# EAGLE board ClassD-V2 (EAGLE 7.6.0)
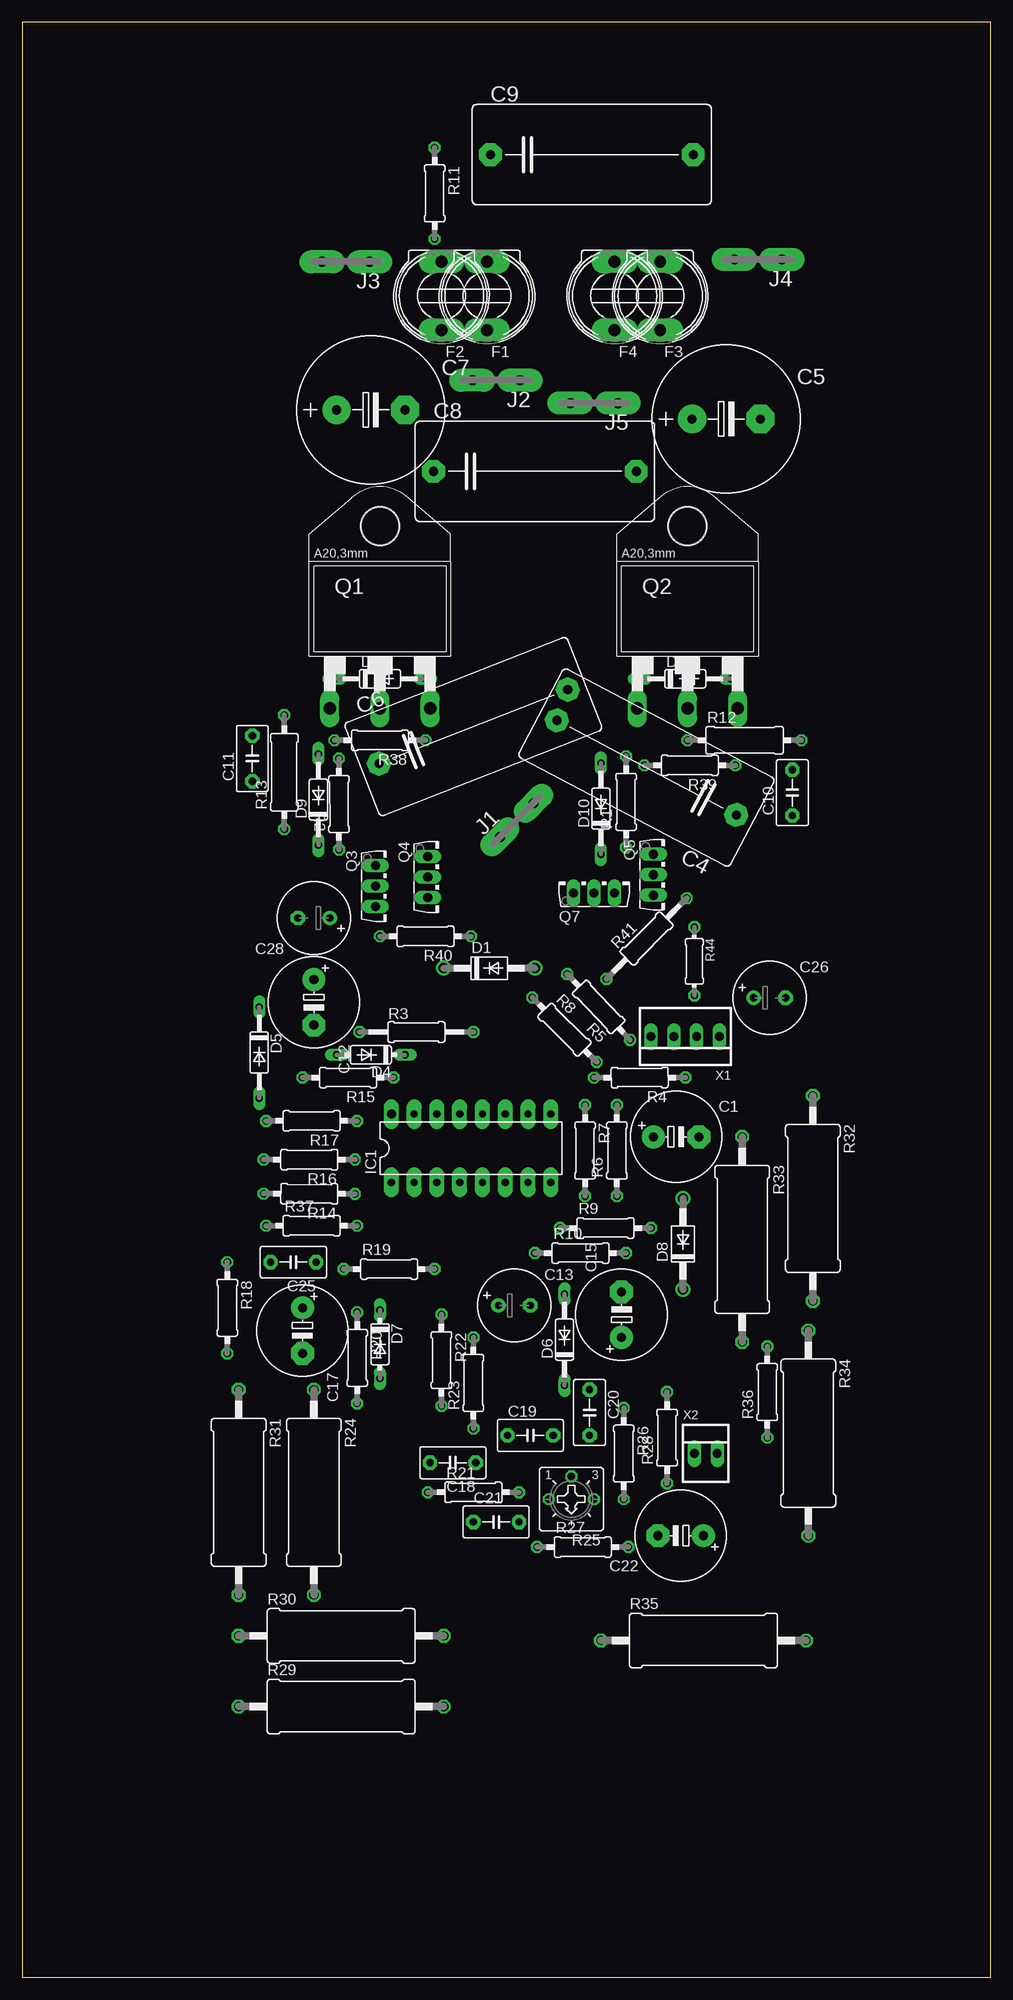
[diagram p0: board, top side]
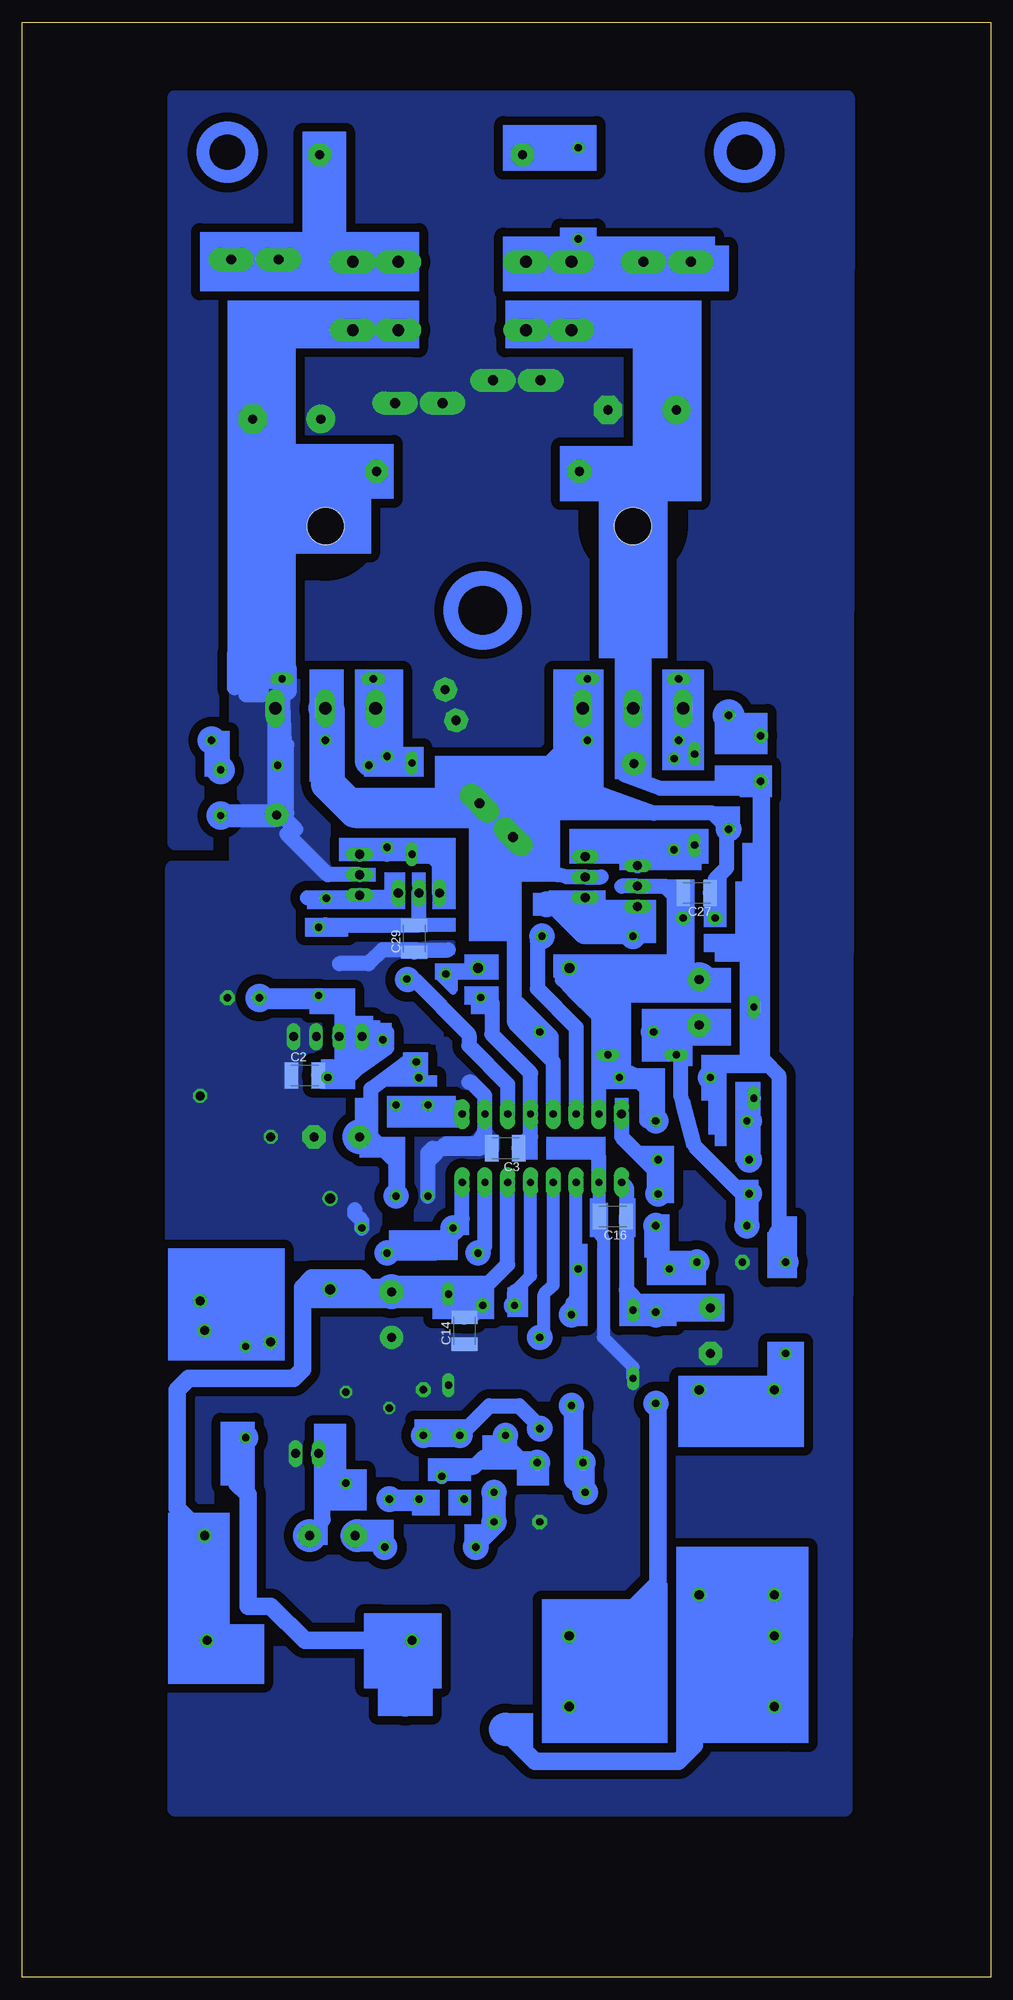
[diagram p1: board, bottom side, seen from below]

Size 107.93 x 217.86 mm. Coordinates in mm from the lower left corner, seen from the top.
Outline: 107.93,217.86 0,217.86 0,0 107.93,0 107.93,217.86
Copper layers (1*16): Top 0.035mm / dielectric 1.5mm / Bottom 0.035mm
Design rules "default": minimum track width 10mil, minimum drill 24mil, track to track 8mil, track to pad 8mil, pad to pad 8mil, via to via 8mil, smd to smd 8mil, copper to edge 40mil, drill to drill 8mil, minimum pad ring 10mil, minimum via ring 8mil, stop-mask expansion 4mil, vias tented up to drill 0mil, thermal gap 10mil

## Footprints (pad centres in the part's own frame; a part is rotated, then mirrored left to right if it is on the bottom)
E5-10,5 = drill 1.016 pad 2.54: + -2.54,0 | drill 1.016 pad 2.54 octagon: - 2.54,0
C1210K = smd 1.5 x 2.9: 1 -1.5,0; 2 1.5,0
C22.5B11 = drill 1.016 pad 2.54 octagon: 1 -11.303,0; 2 11.303,0
E7,5-16 = drill 1.016 pad 3.15: + -3.81,0 | drill 1.016 pad 3.15 octagon: - 3.81,0
C5B3.5 = drill 0.813 pad 1.6 octagon: 1 -2.54,0; 2 2.54,0
E3,5-8 = drill 0.813 pad 1.6: + -1.778,0 | drill 0.813 pad 1.6 octagon: - 1.778,0
DO41-10 = drill 1.118: A 5.08,0; C -5.08,0
DO35-10 = drill 0.813 long: A 5.08,0; C -5.08,0
DO35-7 = drill 0.813 long: A 3.81,0; C -3.81,0
KS9V = drill 1.321 pad 2.54 long: 1 0,3.81; 2 0,-3.81
DIL16 = drill 0.813 pad 1.676 long: 1 -8.89,-3.81; 2 -6.35,-3.81; 3 -3.81,-3.81; 4 -1.27,-3.81; 5 1.27,-3.81; 6 3.81,-3.81; 7 6.35,-3.81; 8 8.89,-3.81; 9 8.89,3.81; 10 6.35,3.81; 11 3.81,3.81; 12 1.27,3.81; 13 -1.27,3.81; 14 -3.81,3.81; 15 -6.35,3.81 | drill 1 pad 1.676 long: 16 -8.89,3.81
F061.040 = drill 1.1 pad 2.54 long: A1 -2.65,0; A2 2.65,0
TOP3 = drill 1.397 long: 1 -5.588,-7.62; 2 0,-7.62; 3 5.588,-7.62 | hole 4.115: 0,12.7
TO126AV = drill 1.016 long: B 2.286,-1.27; C 0,-1.27; E -2.286,-1.27
0207/10 = drill 0.813 octagon: 1 -5.08,0; 2 5.08,0
0207/12 = drill 0.813 octagon: 1 -6.35,0; 2 6.35,0
0309/12 = drill 0.813 octagon: 1 -6.35,0; 2 6.35,0
0617/22 = drill 1.016 octagon: 1 -11.43,0; 2 11.43,0
CT6 = drill 0.813 octagon: A 2.515,0; E -2.515,0; S 0,-2.54
0204/7 = drill 0.813 octagon: 1 -3.81,0; 2 3.81,0
22-23-2041 = drill 1 long: 1 -3.81,0; 2 -1.27,0; 3 1.27,0; 4 3.81,0
22-23-2021 = drill 1 long: 1 -1.27,0; 2 1.27,0

## Placement (x,y rotation side)
C1  22uF  [E5-10,5]  72.88,93.65 0 top
C2  .1  [C1210K]  76.43,100.51 0 bottom
C3  .1  [C1210K]  54.08,92.38 180 bottom
C4  220nF  [C22.5B11]  69.58,134.8 152.2 top
C5  470uF  [E7,5-16]  78.47,173.66 0 top
C6  220nF  [C22.5B11]  50.27,139.37 21.4 top
C7  470uF  [E7,5-16]  38.84,174.68 0 top
C8  220nF  [C22.5B11]  57.13,167.82 0 top
C9  220nF  [C22.5B11]  63.48,203.12 0 top
C10  1nF  [C5B3.5]  85.83,132 90 top
C11  1nF  [C5B3.5]  25.63,135.81 90 top
C12  22uF  [E5-10,5]  32.49,108.64 270 top
C13  10uF  [E3,5-8]  54.84,74.85 0 top
C14  .1  [C1210K]  58.65,72.06 90 bottom
C15  22uF  [E5-10,5]  66.78,73.84 90 top
C16  .1  [C1210K]  42.14,84.76 180 bottom
C17  22uF  [E5-10,5]  31.22,72.06 270 top
C18  2n2  [C5B3.5]  47.99,57.33 180 top
C19  2n2  [C5B3.5]  56.62,60.38 0 top
C20  1nF  [C5B3.5]  63.23,62.92 270 top
C21  HF_FLT  [C5B3.5]  52.81,50.72 0 top
C22  22uF  [E5-10,5]  73.39,49.2 180 top
C25  150pF  [C5B3.5]  30.21,79.68 180 top
C26  10uF  [E3,5-8]  83.29,109.14 0 top
C27  .1  [C1210K]  32.75,120.83 180 bottom
C28  10uF  [E3,5-8]  32.49,118.03 180 top
C29  .1  [C1210K]  64.24,115.75 90 bottom
D1  MUR1100  [DO41-10]  52.05,112.45 0 top
D2  18V  [DO35-10]  39.86,144.7 0 top
D3  18V  [DO35-10]  73.89,144.7 0 top
D4  15V  [DO35-7]  38.84,102.79 180 top
D5  MUR  [DO35-10]  26.4,103.05 270 top
D6  5V6  [DO35-10]  60.43,71.04 90 top
D7  5V6  [DO35-7]  39.86,70.54 270 top
D8  MUR1100  [DO41-10]  73.64,81.71 90 top
D9  4148  [DO35-10]  33,131.24 90 top
D10  4148  [DO35-10]  64.5,130.23 90 top
F1  7A  [KS9V]  51.8,187.38 180 top
F2  [KS9V]  46.72,187.38 180 top
F3  [KS9V]  71.1,187.38 180 top
F4  7A  [KS9V]  66.02,187.38 180 top
IC1  IRS2092  [DIL16]  50.02,92.38 0 top
J1  PWM  [F061.040]  55.1,128.96 45 top
J2  GND  [F061.040]  52.81,177.98 180 top
J3  VCC  [F061.040]  36.05,191.19 180 top
J4  VEE  [F061.040]  82.02,191.44 180 top
J5  PWMGND  [F061.040]  63.73,175.44 180 top
Q1  FQA27N25  [TOP3]  39.86,149.02 0 top
Q2  FQA27N25  [TOP3]  74.15,149.02 0 top
Q3  C2690A  [TO126AV]  40.62,121.59 270 top
Q4  A1220A  [TO126AV]  46.46,122.61 270 top
Q5  A1220A  [TO126AV]  71.61,122.86 270 top
Q7  C2690A  [TO126AV]  63.73,122.1 0 top
R1  10  [0207/10]  67.29,130.99 90 top
R2  10  [0207/10]  35.29,130.73 90.1 top
R3  0R  [0207/12]  43.92,105.33 0 top
R4  10  [0207/10]  68.81,100.25 180.1 top
R5  4R7  [0207/10]  64.24,108.13 133.7 top
R6  NC  [0207/10]  66.27,92.13 90 top
R7  10K  [0207/10]  62.72,92.13 270 top
R8  0  [0207/10]  60.43,105.59 315 top
R9  7K5  [0207/10]  65,83.49 0 top
R10  10K  [0207/10]  62.21,80.7 0 top
R11  1  [0207/10]  45.95,198.81 270 top
R12  10  [0309/12]  80.5,137.85 0 top
R13  10  [0309/12]  29.19,134.29 90 top
R14  10K  [0207/10]  31.98,87.3 179.8 top
R15  33K  [0207/10]  36.3,100.25 180 top
R16  9K1  [0207/10]  31.98,91.11 180 top
R17  10K  [0207/10]  32.24,95.43 180 top
R18  0R  [0207/10]  22.84,74.6 270 top
R19  100K  [0207/10]  40.87,78.92 0 top
R20  0R  [0207/10]  37.32,69.01 270 top
R21  3K  [0207/10]  50.27,54.03 0 top
R22  0R  [0207/10]  46.72,68.76 270 top
R23  0R  [0207/10]  50.27,66.22 90 top
R24  4K7  [0617/22]  32.49,54.03 270 top
R25  2K  [CT6]  61.19,53.26 180 top
R26  100  [0207/10]  67.04,58.34 270 top
R27  470  [0207/10]  62.46,47.93 0 top
R28  69K  [0207/10]  71.86,60.12 90 top
R29  4K7  [0617/22]  35.54,30.15 0 top
R30  4K7  [0617/22]  35.54,38.02 0 top
R31  4K7  [0617/22]  24.11,54.03 270 top
R32  4K7  [0617/22]  88.12,86.79 270 top
R33  4K7  [0617/22]  80.24,82.22 270 top
R34  4K7  [0617/22]  87.61,60.63 270 top
R35  4K7  [0617/22]  75.93,37.52 0 top
R36  0  [0207/10]  83.04,65.2 90 top
R37  1K  [0207/10]  32.24,83.74 0 top
R38  10K  [0207/10]  39.86,137.85 180 top
R39  10K  [0207/10]  74.4,135.05 180 top
R40  10  [0207/10]  44.94,116 180 top
R41  10  [0207/12]  69.58,115.75 45.1 top
R44  0R  [0204/7]  74.91,113.21 270 top
X1  12V  [22-23-2041]  73.89,104.83 180 top
X2  IN  [22-23-2021]  76.18,58.34 0 top

## Library data of the parts
C1-C3 C5 C7 C12-C17 C22 C26-C29 R1-R24 R26-R41 R44 = resistor
C4 C6 C8-C11 C18-C21 C25 = capacitor-wima
D1-D10 = diode
F1-F4 = fuse; OC_FARNELL: unknown; OC_NEWARK: unknown
IC1 = ic-package
J1-J5 = con-faston; OC_FARNELL: unknown; OC_NEWARK: unknown
Q1 Q2 = transistor-fet
Q3-Q5 Q7 = transistor-power
R25 = pot
X1 = con-molex; MF: MOLEX; MPN: 22-23-2041; OC_FARNELL: 1462920; OC_NEWARK: 38C0355
X2 = con-molex; MF: MOLEX; MPN: 22-23-2021; OC_FARNELL: 1462926; OC_NEWARK: 25C3832

## Nets
COM: C1.- C2.1 C3.2 C4.1 C5.- C8.2 C10.1 C26.- C29.1 D3.A D8.A F3.1 F4.1 IC1.10 Q2.3 Q5.C R7.2 R9.2 R32.1 R33.1 R39.1 X1.1 X1.2
N$1: D2.C D9.A Q1.1 R2.2 R38.2
N$3: D3.C D10.A Q2.1 R1.2 R39.2
N$4: IC1.8 R9.1 R10.2
N$5: C6.1 C7.+ C8.1 C11.1 D5.C F1.1 F2.1 Q1.2 R15.2 R18.1
N$6: IC1.14 R40.1
N$7: IC1.11 R41.1
N$8: D1.A R5.2
N$9: C9.2 F3.2 F4.2 J4.A1 J4.A2
N$10: C3.1 IC1.12 R8.1
N$11: C12.+ C27.2 C28.+ D1.C D4.C IC1.15 Q3.C R15.1 R17.1
N$12: IC1.9 R6.2 R7.1
N$13: C1.+ R4.2 R6.1 R8.2
N$14: C9.1 R11.1
N$15: C11.2 R13.2
N$16: D9.C Q3.E Q4.E R2.1
N$17: R25.E R26.2
N$18: C2.2 C26.+ R4.1 R5.1 R44.2 X1.3 X1.4
N$19: IC1.7 R10.1
N$20: F1.2 F2.2 J3.A1 J3.A2 R11.2
N$21: C10.2 R12.2
N$22: IC1.16 R14.1 R16.1
N$23: D5.A R16.2 R17.2
N$24: C13.+ IC1.5
N$25: C25.1 R19.1 R37.2
N$26: IC1.3 R19.2 R22.1
N$27: C18.1 C19.1 R25.S
N$28: C19.2 C20.2 R23.1
N$29: C18.2 R21.1 R22.2
N$30: IC1.4 R23.2
N$31: R18.2 R24.1 R31.1
N$32: C21.2 R21.2 R27.1
N$33: C22.- R27.2
N$34: C22.+ R28.1 X2.1
N$35: R35.1 R36.1
N$36: R24.2 R29.1 R30.1 R31.2
N$37: R20.2 R29.2 R30.2
N$38: R32.2 R33.2 R34.1 R36.2
N$39: C13.- C14.2 C15.- D6.A D8.C IC1.6 R34.2 R35.2
N$40: C12.- D4.A R3.1 R14.2 R37.1
N$41: C27.1 C28.- D2.A IC1.13 J1.A1 J1.A2 Q1.3 Q2.2 Q4.C R3.2 R12.1 R13.1 R38.1
N$43: Q5.B Q7.B R41.2
N$44: Q3.B Q4.B R40.2
N$45: C29.2 Q7.C R44.1
N$47: D10.C Q5.E Q7.E R1.1
PGND: C4.2 C5.+ C6.2 C7.- C14.1 C15.+ C16.2 C17.- C20.1 C21.1 C25.2 D6.C D7.A IC1.2 J2.A1 J2.A2 J5.A1 J5.A2 R26.1 R28.2 X2.2
PGND1: C16.1 C17.+ D7.C IC1.1 R20.1

## Tracks (layer width: path | path; a pad name or v marks a point on that pad's centre or on a via)
COM
  Bottom 1.422: C5.- 79.99,183.57 F3.1 F4.1
  Bottom 1.676: 78.47,129.72 78.47,137.34 78.72,137.59 D3.A | IC1.10 56.37,94.16 57.13,92.89 60.69,92.89 62.72,90.86 R7.2 62.72,91.87 62.21,92.38 56.88,92.38 56.37,92.89 56.37,98.22 57.89,99.75 58.15,99.75 | R9.2 70.08,84.25 70.85,85.01 70.85,85.52 | D3.A 78.97,141.66 79.74,141.66 79.74,129.53 C4.1 79.04,129.53 77.45,127.94 78.47,127.43 73.89,122.86 Q5.C | C8.2 78.97,166.29 78.97,165.79 | 78.97,165.79 D3.A | 84.31,143.69 84.31,147.5 83.04,147.5 83.04,142.93 81.26,142.93 81.26,143.94 82.28,143.94 82.28,145.97 82.02,145.97 82.02,144.2 81.01,144.2 81.01,145.97 80.75,145.97 80.75,144.45 79.48,144.45 79.48,145.97 79.23,145.97 79.23,143.43 78.47,143.43 78.47,145.97 78.21,145.97 78.21,143.18 | C5.- 80.24,174.68 80.24,165.79 78.97,165.79 | C29.1 64.01,114.48 | 64.01,114.48 60.43,114.48 | 64.01,114.48 67.8,114.48 69.32,112.95 72.62,112.95
  Bottom 2.54: C10.1 79.57,129.46 C4.1
  pour Bottom (isolate 1.016, no thermals): 69.32,80.44 91.17,80.44 91.17,123.62 84.05,123.62 84.05,145.47 66.02,145.47 44.94,114.48 45.19,114.73 57.38,88.57 60.94,85.01 68.05,84.76
N$1
  Bottom 1.676: R38.2 34.78,135.34 R2.2 34.77,136.32 D9.A | R38.2 D2.C | R38.2 34.27,138.35 Q1.1
  Bottom 1.93: Q1.1 34.78,140.89 D2.C
N$2
  Bottom 1.676: 71.1,101.02 67.29,104.06 67.29,105.33 68.05,105.33 67.29,103.56 71.61,100.51
N$3
  Bottom 1.676: D10.A 65,135.81 67.29,135.81 | R39.2 68.31,136.07 R1.2 | 66.78,136.07 R1.2 | R1.2 67.29,135.81 | R1.2 67.54,135.81 67.29,135.81
  Bottom 1.93: R1.2 D3.C 68.56,138.1 Q2.1
N$4
  Bottom 1.676: R10.2 61.96,80.7 59.92,82.73 R9.1 58.91,84.51 IC1.8
N$5
  Bottom 1.422: C7.+ 35.54,183.57 F2.1 F1.1
  Bottom 1.676: C8.1 39.86,166.29 | 39.86,166.29 Q1.2 39.86,134.74 C6.1 40,136.07 39.1,136.07 40.87,134.04 36.81,132.51 27.16,132.51 | C7.+ 35.29,166.8 39.86,166.8 39.86,166.29 | 27.16,132.51 C11.1 | 27.16,102.03 26.9,102.29 D5.C 26.9,111.43 25.63,112.7 25.63,132.51 25.89,132.77 26.9,132.77 27.16,132.51 | 27.16,102.03 25.13,102.03 23.6,100.51 23.6,80.44 23.35,80.19 | 27.16,102.03 27.41,101.78 30.46,101.78 30.46,100.76 30.71,100.76 R15.2 | R18.1 23.35,80.44 23.35,80.19 | 23.35,80.19 23.09,79.93
N$6
  Bottom 1.676: IC1.14 46.21,105.84 50.53,110.16 50.53,115.49 R40.1
N$7
  Bottom 1.676: IC1.11 53.83,99.49 58.15,103.81 58.15,105.08 64.24,111.18 65,111.18 65.08,111.25 R41.1 64.96,111.39
N$8
  Bottom 0.813: R5.2 60.85,111.68 61.45,111.68 61.45,111.43 59.92,109.91 59.92,111.43 60.69,111.43 60.43,111.18 | 60.43,111.18 60.43,110.67 | 60.43,111.18 60.43,111.94 59.92,112.45 D1.A
N$9
  Bottom 1.422: J4.A1 J4.A2 | 74.15,191.44 71.1,191.44 F3.2 F4.2
  Bottom 1.676: C9.2 74.15,203.12 74.15,191.44 J4.A2
N$10
  Bottom 1.676: R8.1 56.37,108.71 55.61,108.71 55.61,105.08 51.29,100.76 IC1.12 51.29,93.67 C3.1
N$11
  Bottom 1.676: D1.C 47.73,112.45 | 46.59,110.03 47.73,111.18 47.73,112.45 | 46.59,110.03 43.67,107.11 | 47.73,112.45 47.48,112.19 46.97,112.19 | IC1.15 43.67,100.25 | 43.67,100.25 43.67,107.11 | 43.67,100.25 R15.1 42.65,100.76 | 42.65,100.76 D4.C | R17.1 38.33,95.43 38.33,98.98 40.11,100.76 42.65,100.76 | 43.67,107.11 41.13,109.65 33.51,109.65 32.49,110.67 C12.+ | 41.13,121.59 Q3.C 36.3,121.59 35.29,120.57 | 35.29,120.57 35.29,109.91 35.41,110.03 46.59,110.03 | C28.+ 34.25,118.06 C27.2 35.03,120.83 35.29,120.57
N$12
  Bottom 1.676: R6.2 63.73,97.21 | 63.73,97.21 R7.1 | IC1.9 62.72,96.19 63.73,97.21
N$13
  Bottom 1.676: R6.1 66.27,90.86 69.07,93.65 | 69.07,93.65 69.07,98.98 66.15,101.14 | 66.15,101.14 65.04,102 R8.2 | R4.2 66.15,100.88 66.15,101.14 | C1.+ 69.07,93.65
N$14
  Bottom 1.676: C9.1 46.21,203.12 46.21,203.89 R11.1
N$15
  Bottom 1.676: R13.2 C11.2
N$16
  Bottom 1.676: Q4.E 43.92,126.16 40.11,126.16 | 40.11,126.16 D9.C 33.51,125.65 R2.1 | Q3.E 40.11,126.16
N$17
  Bottom 1.676: R25.E 62.97,52.76 66.78,52.76 R26.2
N$18
  Bottom 1.676: C2.2 73.63,100.51 R4.1 71.6,100.25 71.1,100.76 67.5,104.36 R5.1 69.95,105.47 X1.4 X1.3 72.37,105.08 72.12,105.08 72.12,107.37 73.64,108.89 R44.2 81.26,109.4 C26.+
N$19
  Bottom 1.676: R10.1 56.37,81.46 IC1.7
N$20
  Bottom 1.422: F1.2 F2.2 45.95,191.19 J3.A1 J3.A2
  Bottom 1.676: R11.2 45.95,191.19
N$21
  Bottom 1.676: R12.2 85.83,136.83 C10.2
N$22
  Bottom 1.676: IC1.16 41.13,93.65 37.06,89.59 | R14.1 37.06,87.54 37.06,89.59 | 37.06,89.59 R16.1
N$23
  Bottom 1.676: R16.2 R17.2 D5.A
N$24
  Bottom 1.422: 53.07,76.38 51.29,78.16 IC1.5
  Bottom 1.676: C13.+ 53.07,76.38
N$25
  Bottom 1.676: R37.2 37.32,79.93 R19.1 35.79,78.66 36.81,79.68 C25.1
N$26
  Bottom 0.406: R19.2 46.21,78.92 46.21,76.89
  Bottom 1.422: R22.1 46.72,75.11 46.21,75.62 46.21,76.89 IC1.3
  Bottom 1.676: 46.21,88.32 IC1.3 46.21,88.82
N$27
  Bottom 1.676: C19.1 54.08,59.36 52.69,57.96 | 52.69,57.96 52.05,57.33 C18.1 | 52.69,57.96 56.5,57.96 57.64,56.82 60.69,56.82 61.19,56.31 R25.S
N$28
  Bottom 1.676: R23.1 50.27,61.39 52.56,63.68 55.86,63.68 C19.2 C20.2
N$29
  Bottom 1.676: R21.1 46.72,55.3 46.72,57.33 | 46.72,57.33 R22.2 | C18.2 46.72,57.33
N$30
  Bottom 1.422: R23.2 49.76,71.81 49.76,76.12 48.75,77.14 IC1.4
N$31
  Bottom 1.93: R24.1 R31.1 R18.2
N$32
  Bottom 1.676: C21.2 55.35,51.23 | 55.35,51.23 R21.2 | R27.1 55.1,50.22 55.1,51.49 55.35,51.23
N$33
  Bottom 1.676: C22.- 68.31,49.2 67.54,48.44 R27.2
N$34
  Bottom 1.676: C22.+ 74.4,50.98 74.4,55.04 | 74.4,55.04 74.4,57.58 74.91,58.09 X2.1 74.91,58.6 | R28.1 74.4,55.04
N$35
  Bottom 1.93: 64.5,31.67 R35.1 76.43,37.52 80.24,41.33 82.78,41.33 82.78,53.77 84.05,55.04 84.05,59.11 R36.1
N$36
  Bottom 1.93: R29.1 R30.1 R31.2 R24.2 33,42.09 33,25.83 34.78,24.05 50.78,24.05 54.08,27.36
N$37
  Bottom 1.93: R20.2 37.06,63.93 37.06,43.87 42.91,38.02 R30.2 | R29.2 R30.2 | R30.2 46.97,38.28 46.72,38.53 46.72,38.28 R30.2
N$38
  Bottom 1.93: R34.1 83.29,70.54 | R34.1 R32.2 84.31,71.55 R33.2 | R36.2 84.82,72.06 R34.1
N$39
  Bottom 1.676: C13.- 56.62,76.63 53.83,79.43 IC1.6 | C15.- 60.18,76.38 | C13.- 58.15,76.38 60.18,76.38 | C13.- 57.89,73.58 58.65,73.58 C14.2 | D6.A 60.18,76.38 | D8.C 73.39,77.9
  Bottom 1.93: R35.2 87.61,37.77 R34.2 90.66,52.25 90.66,65.46 89.39,66.73 77.7,66.73 76.69,67.74 76.69,76.89 75.67,77.9 73.39,77.9 70.34,77.9 69.32,76.89 66.02,76.89 66.53,76.38 C15.-
N$40
  Bottom 1.676: 26.92,87.3 R14.2 27.16,87.06 27.16,86.79 | R37.1 27.16,86.79 | 27.16,86.79 33,92.63 34.27,97.46 34.52,98.22 34.52,102.79 | 34.52,102.79 34.52,103.3 | R3.1 34.78,105.33 | 34.78,105.33 34.02,105.33 33.51,105.84 32.49,105.84 C12.- | D4.A 34.78,103.05 | 34.78,103.05 34.78,105.33 | 34.78,103.05 34.52,102.79
N$41
  Bottom 1.676: 52.81,108.64 49,104.83 49,102.29 | IC1.13 48.75,102.03 49,102.29 | 49,102.29 51.16,104.44 | 51.16,104.44 53.07,106.35 53.07,122.86 | 53.07,122.86 53.07,129.46 | 53.07,129.46 53.07,129.97 53.07,131.75 | 53.07,131.75 53.57,131.75 53.57,132 54.08,132 54.08,129.46 53.07,129.46 | 53.07,131.75 J1.A1 | J1.A1 J1.A2 | J1.A2 59.42,131.75 | J1.A1 53.32,131.75 53.32,130.23 59.27,130.23 J1.A2 | R12.1 Q2.2 | 47.86,135.18 45.95,132.77 37.57,129.72 30.97,129.72 R13.1 29.44,127.69 29.44,123.62 30.71,122.35 C28.- 30.71,120.3 C27.1 | R3.2 51.16,104.44 | R38.1 45.45,138.35 45.45,141.15 | 50.53,130.73 50.53,130.99 51.29,131.75 | 43.41,122.61 Q4.C 47.22,122.61 48.24,122.86 53.07,122.86
  Bottom 1.93: D2.A 45.45,136.83 45.45,141.15
  Bottom 3.81: Q2.2 73.89,141.15 73.89,133.02 70.85,129.97 53.07,129.97 51.29,131.75 47.86,135.18 46.72,136.32 45.45,136.32 45.45,141.15 Q1.3 45.45,142.16
N$43
  Bottom 1.676: 76.18,120.32 74.66,120.32 | 74.66,120.32 70.34,120.32 | Q5.B 70.34,120.32 | R41.2 74.66,119.88 74.66,120.32 | Q7.B 66.78,120.32 70.34,120.32
N$44
  Bottom 1.676: 45.19,116 45.45,116 49,119.56 48.75,119.56 45.19,116 | 45.19,116 40.62,116 | 40.62,116 R40.2 | Q4.B 45.19,116 | Q3.B 40.62,116
N$45
  Bottom 1.676: R44.1 74.15,117.27 64.24,117.27 | 64.24,117.27 63.73,117.27 Q7.C | C29.2 64.24,117.27
N$46
  Bottom 1.676: 43.67,88.32 43.67,91.36 44.18,91.87
N$47
  Bottom 1.676: Q7.E 61.45,124.13 62.46,125.15 D10.C 67.29,125.15 | 67.29,125.15 Q5.E | 67.29,126.16 R1.1 67.29,125.15
PGND
  Bottom 1.422: IC1.2 43.64,88.57 C16.2 43.64,82.96 43.16,82.22 43.16,71.3 39.86,68 D7.A
  pour Bottom (isolate 1.016, no thermals): 90.91,126.42 90.91,209.47 15.98,209.47 16.24,18.72 90.91,18.72 90.91,80.44 58.4,80.44 73.39,146.23 86.85,146.99 86.85,126.42
PGND1
  Bottom 1.27: R20.1 36.81,74.6 36.56,74.6
  Bottom 1.676: IC1.1 40.62,88.06 40.62,82.98 | 40.62,82.98 40.62,76.63 39.1,75.11 D7.C 36.56,74.6 C17.+ | C16.1 40.62,82.98
(copper drawn outside any net)
  shapes: Bottom area x336, Bottom circle x69